# EAGLE board usb_module (EAGLE 7.2.0)
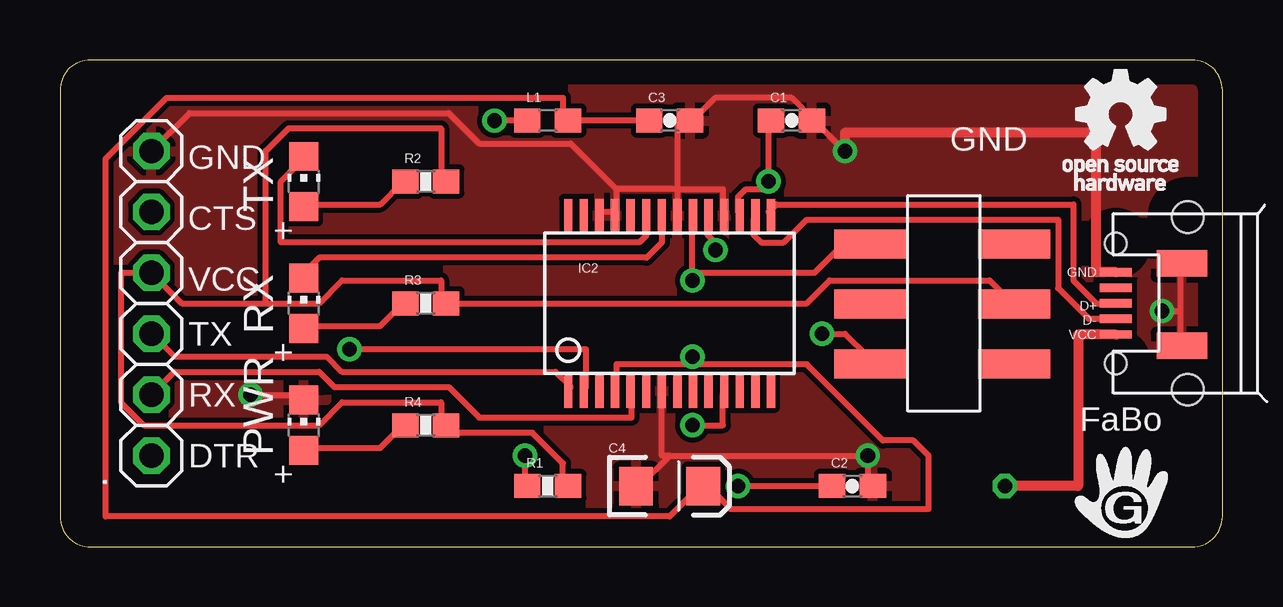
[diagram p0: board, top side]
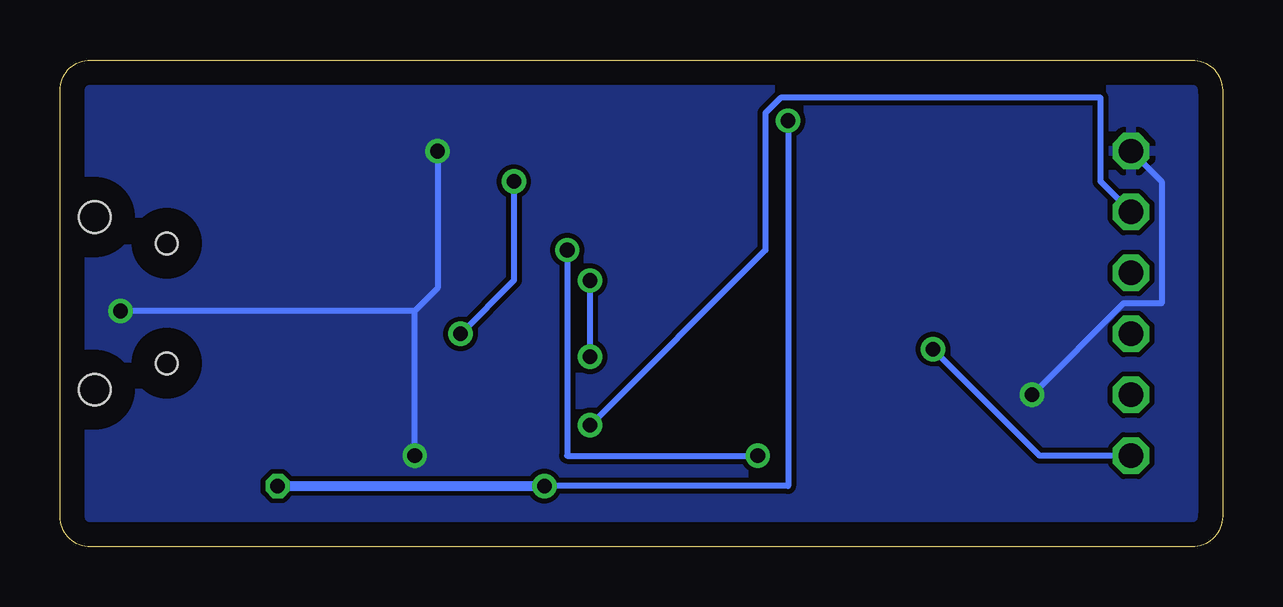
[diagram p1: board, bottom side, seen from below]

Size 48.44 x 20.31 mm. Coordinates in mm from the lower left corner, seen from the top.
Outline: 0,19.04 0,1.27 arc90 1.27,0 47.17,0 arc90 48.44,1.27 48.44,19.04 arc90 47.17,20.31 1.27,20.31 arc90 0,19.04
Copper layers (1*16): Top 0.035mm / dielectric 1.5mm / Bottom 0.035mm
Design rules "default": minimum track width 10mil, minimum drill 24mil, track to track 8mil, track to pad 8mil, pad to pad 8mil, via to via 8mil, smd to smd 8mil, copper to edge 40mil, drill to drill 8mil, minimum pad ring 10mil, minimum via ring 8mil, stop-mask expansion 4mil, vias tented up to drill 0mil, thermal gap 10mil

## Footprints (pad centres in the part's own frame; a part is rotated, then mirrored left to right if it is on the bottom)
1X06 = drill 1.016 octagon: 1 -6.35,0; 2 -3.81,0; 3 -1.27,0; 4 1.27,0; 5 3.81,0; 6 6.35,0
0603-CAP = smd 1.1 x 1: 1 -0.85,0; 2 0.85,0
EIA3216 = smd 1.4 x 1.6: A 1.4,0; C -1.4,0
SSOP28DB = smd 0.348 x 1.397: 1 -4.225,-3.656; 2 -3.575,-3.656; 3 -2.925,-3.656; 4 -2.275,-3.656; 5 -1.625,-3.656; 6 -0.975,-3.656; 7 -0.325,-3.656; 8 0.325,-3.656; 9 0.975,-3.656; 10 1.625,-3.656; 11 2.275,-3.656; 12 2.925,-3.656; 13 3.575,-3.656; 14 4.225,-3.656; 15 4.225,3.656; 16 3.575,3.656; 17 2.925,3.656; 18 2.275,3.656; 19 1.625,3.656; 20 0.975,3.656; 21 0.325,3.656; 22 -0.325,3.656; 23 -0.975,3.656; 24 -1.625,3.656; 25 -2.275,3.656; 26 -2.925,3.656; 27 -3.575,3.656; 28 -4.225,3.656
0603 = smd 1.1 x 1: 1 -0.85,0; 2 0.85,0
CHIP-LED0805 = smd 1.2 x 1.2: A 0,-1.05; C 0,1.05
0603-RES = smd 1.1 x 1: 1 -0.85,0; 2 0.85,0
USB-MICRO-B-FEMALE = smd 1.35 x 0.35: D+ 3,0; D- 3,0.65; GND 3,-1.3; ID 3,-0.65; VCC 3,1.3 | smd 2.1 x 1.1: GND1 0.246,1.77; GND2 0.246,-1.67 | hole 1.3: 0,3.6; 0,-3.6 | hole 0.9: 3,2.5; 3,-2.5
C&K_JS202011SCQN = smd 3 x 1.2: 1 -3.07,2.47; 2 -3.07,-0.03; 3 -3.07,-2.53; 4 2.93,-2.53; 5 2.93,-0.03; 6 2.93,2.47

## Placement (x,y rotation side)
.  [1X06]  3.81,10.16 90 top
C1  0.1μF  [0603-CAP]  30.48,17.78 0 top
C2  10nF  [0603-CAP]  33.02,2.54 0 top
C3  0.1μF  [0603-CAP]  25.4,17.78 0 top
C4  10μF  [EIA3216]  25.4,2.54 0 top
IC2  FT232RLSSOP  [SSOP28DB]  25.4,10.16 0 top
L1  [0603]  20.32,17.78 0 top
PWR  [CHIP-LED0805]  10.16,5.08 0 top
R1  47K  [0603-RES]  20.32,2.54 0 top
R2  270  [0603-RES]  15.24,15.24 0 top
R3  270  [0603-RES]  15.24,10.16 0 top
R4  270  [0603-RES]  15.24,5.08 0 top
RX  [CHIP-LED0805]  10.16,10.16 0 top
TX  [CHIP-LED0805]  10.16,15.24 0 top
U$1  USB-MICRO-B-FEMALE  [USB-MICRO-B-FEMALE]  46.99,10.16 180 top
U$2  C&K_JS202011SCQN  [C&K_JS202011SCQN]  36.83,10.16 0 top
U$3  [LOGO_OSHW_T_M]  44.2,18.03 0 top
U$4  [LOGO_FABO_M]  44.2,2.29 0 top

## Library data of the parts
. PWR RX TX = adafruit
C1-C4 IC2 L1 R1-R4 = SparkFun
U$1 U$3 U$4 = gclue
U$2 = gclueParts

## Nets
+3V3: C1.1 IC2.17 U$2.3
+5V: C3.1 C4.A IC2.4 IC2.20 L1.2 U$2.1
CTS: ..5 IC2.11
D+: IC2.15 U$1.D+
D-: IC2.16 U$1.D-
DCD: IC2.10
DSR: IC2.9
DTR: ..1 IC2.2
GND: ..6 C1.2 C2.2 C3.2 C4.C IC2.7 IC2.18 IC2.21 IC2.25 IC2.26 PWR.C U$1.GND U$1.GND1 U$1.GND2
N$1: C2.1 L1.1 U$1.VCC
N$2: R2.1 TX.A
N$5: R3.1 RX.A
N$6: PWR.A R4.1
PWREN: IC2.14
RESET: IC2.19 R1.1
RI: IC2.6
RTS: IC2.3
RX: ..2 IC2.5
RXLED: IC2.22 RX.C
SLEEP: IC2.12
TX: ..3 IC2.1
TXDEN: IC2.13
TXLED: IC2.23 TX.C
VCC: ..4 R1.2 R2.2 R3.2 R4.2 U$2.5

## Tracks (layer width: path | path; a pad name or v marks a point on that pad's centre or on a via)
+3V3  (via drill 0.61)
  Top 0.254: C1.1 29.53,17.78 v29.53,15.24 29.53,14.92 28.57,14.92 28.26,14.61 28.26,13.97 IC2.17 | v31.75,8.89 32.7,8.89 33.66,7.94 U$2.3
  Bottom 0.254: v31.75,8.89 29.53,11.11 v29.53,15.24
+5V  (via drill 0.61)
  Top 0.254: 26.35,11.43 26.35,13.65 IC2.20 | 26.35,11.43 31.43,11.43 32.38,12.38 33.66,12.38 U$2.1 | C3.1 L1.2 20.95,17.78 20.95,18.73 4.45,18.73 1.91,16.19 1.91,1.27 25.4,1.27 26.67,2.54 C4.A 26.99,2.54 27.94,1.59 36.2,1.59 36.2,3.81 35.56,4.45 34.29,4.45 31.11,7.62 26.35,7.62 | 26.35,7.62 23.18,7.62 23.18,6.67 IC2.4 | v26.35,11.11 26.35,11.43 | 26.35,7.62 v26.35,7.94
  Bottom 0.254: v26.35,7.94 v26.35,11.11
CTS  (via drill 0.61)
  Top 0.254: v26.35,5.08 27.62,5.08 27.62,6.35 IC2.11
  Bottom 0.254: v26.35,5.08 19.05,12.38 19.05,18.1 18.41,18.73 5.08,18.73 5.08,15.24 ..5
D+
  Top 0.254: U$1.D+ 43.18,10.16 42.23,11.11 42.23,14.29 29.84,14.29 29.53,13.97 IC2.15
D-
  Top 0.254: U$1.D- 43.81,9.53 42.86,9.53 41.59,10.79 41.59,13.65 31.11,13.65 30.16,12.7 29.21,12.7 28.89,13.02 28.89,13.65 IC2.16
DTR  (via drill 0.61)
  Top 0.254: v12.06,8.26 21.91,8.26 21.91,6.67 IC2.2
  Bottom 0.254: v12.06,8.26 7.62,3.81 ..1
GND  (via drill 0.61)
  Top 0.254: 46.67,9.84 46.67,11.75 U$1.GND2 | 46.67,9.84 46.67,8.57 U$1.GND1 | 25.4,3.81 v33.66,3.81 33.66,2.54 C2.2 | 25.4,3.81 24.13,2.54 C4.C | 25.4,3.81 25.08,3.81 25.08,6.35 IC2.7 | v45.91,9.84 46.67,9.84 | 23.18,13.97 22.54,13.97 IC2.26 | 31.43,17.78 30.48,18.73 27.3,18.73 26.35,17.78 C3.2 25.72,17.78 25.72,14.92 | 25.72,14.92 25.72,13.97 IC2.21 | 25.72,14.92 27.62,14.92 27.62,13.97 IC2.18 | 23.18,14.92 23.18,13.97 | 25.72,14.92 23.18,14.92 | 23.18,13.97 IC2.25 | v7.94,6.35 10.16,6.35 PWR.C | 23.18,14.92 21.27,16.83 17.46,16.83 16.19,18.1 5.4,18.1 ..6 | 31.43,17.78 v32.7,16.51 | 31.43,17.78 C1.2
  Top 0.406: U$1.GND 43.18,11.46 43.18,17.27 32.7,17.27 v32.7,16.51
  Bottom 0.254: 33.66,9.84 v45.91,9.84 | v33.66,3.81 33.66,9.84 | v7.94,6.35 4.13,10.16 2.54,10.16 2.54,15.24 ..6 | 33.66,9.84 32.7,10.79 v32.7,16.51
  pour Top: -0.76,21.08 49.02,21.08 49.02,-0.51 -0.76,-0.51
  pour Bottom: -1.02,21.84 49.78,21.84 49.78,-1.02 -1.02,-1.02
N$1  (via drill 0.6, 0.61)
  Top 0.254: v28.26,2.54 C2.1 | L1.1 v18.1,17.78
  Top 0.406: U$1.VCC 42.42,8.86 42.42,2.54 v39.37,2.54
  Bottom 0.254: v28.26,2.54 18.1,2.54 v18.1,17.78
  Bottom 0.406: v39.37,2.54 v28.26,2.54
N$2
  Top 0.254: R2.1 14.29,15.24 13.34,14.29 10.16,14.29 TX.A
N$5
  Top 0.254: R3.1 14.29,10.16 13.34,9.21 10.16,9.21 RX.A
N$6
  Top 0.254: R4.1 14.29,5.08 13.34,4.13 10.16,4.13 PWR.A
RESET  (via drill 0.61)
  Top 0.254: v19.37,3.81 19.37,2.54 R1.1 | v27.3,12.38 27.3,12.7 26.99,13.02 26.99,13.65 IC2.19
  Bottom 0.254: v19.37,3.81 27.3,3.81 v27.3,12.38
RX
  Top 0.254: ..2 4.76,7.3 10.79,7.3 11.43,6.67 16.19,6.67 17.46,5.4 23.81,5.4 23.81,6.35 IC2.5
RXLED
  Top 0.254: RX.C 10.16,11.43 10.79,12.06 24.45,12.06 25.08,12.7 25.08,13.65 IC2.22
TX
  Top 0.254: ..3 4.76,7.94 11.11,7.94 11.75,7.3 20.64,7.3 21.27,6.67 IC2.1
TXLED
  Top 0.254: TX.C 10.16,16.19 9.21,15.24 9.21,12.7 24.13,12.7 24.45,13.02 24.45,13.65 IC2.23
VCC
  Top 0.254: R1.2 20.95,2.54 20.95,3.49 19.68,4.76 16.51,4.76 16.19,5.08 R4.2 15.88,5.08 15.88,6.03 11.75,6.03 10.79,5.08 3.49,5.08 2.54,6.03 2.54,11.43 ..4 5.08,10.16 8.57,10.16 | 8.57,10.16 10.79,10.16 11.75,11.11 15.88,11.11 15.88,10.16 R3.2 31.11,10.16 32.07,11.11 38.73,11.11 39.69,10.16 U$2.5 | 8.57,10.16 8.57,16.51 9.53,17.46 15.88,17.46 15.88,15.24 R2.2

## Text on the board
tPlace: GND | GND | CTS | VCC | TX | RX | DTR